# EAGLE board board_kelengkeng_v2 (EAGLE 9.6.2)
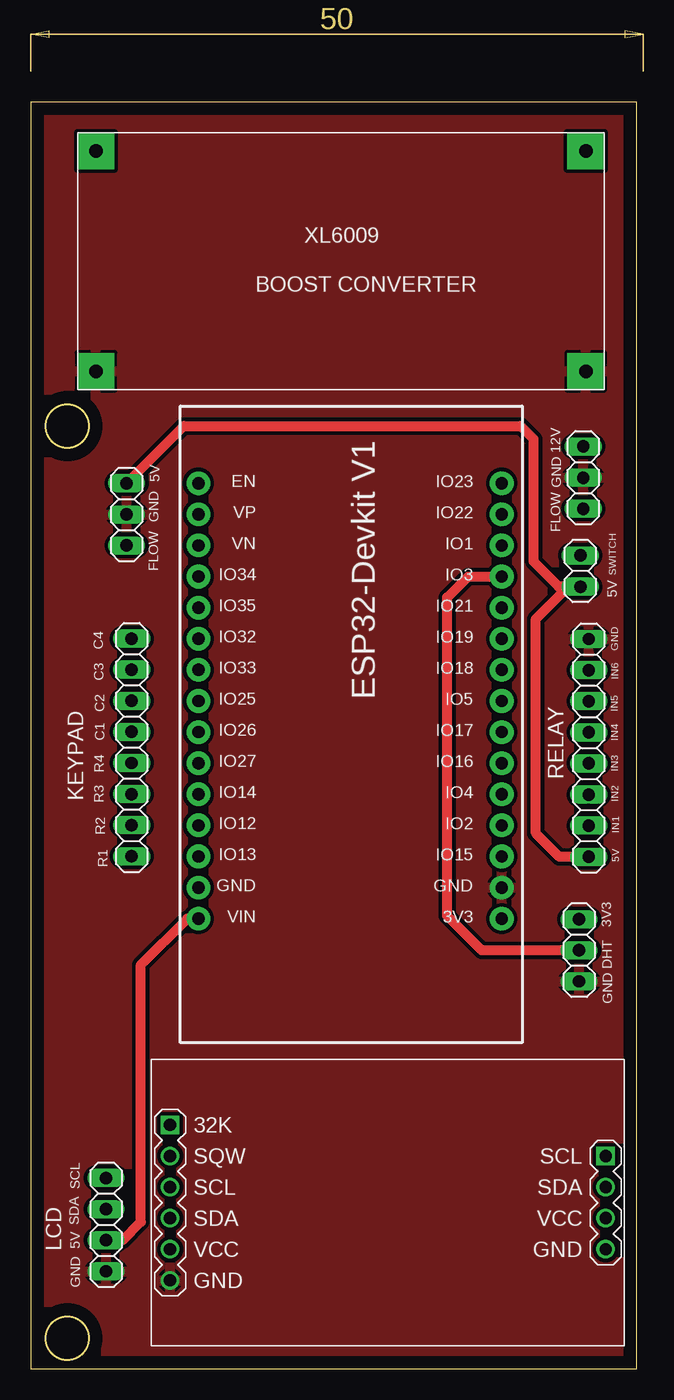
[diagram p0: board, top side]
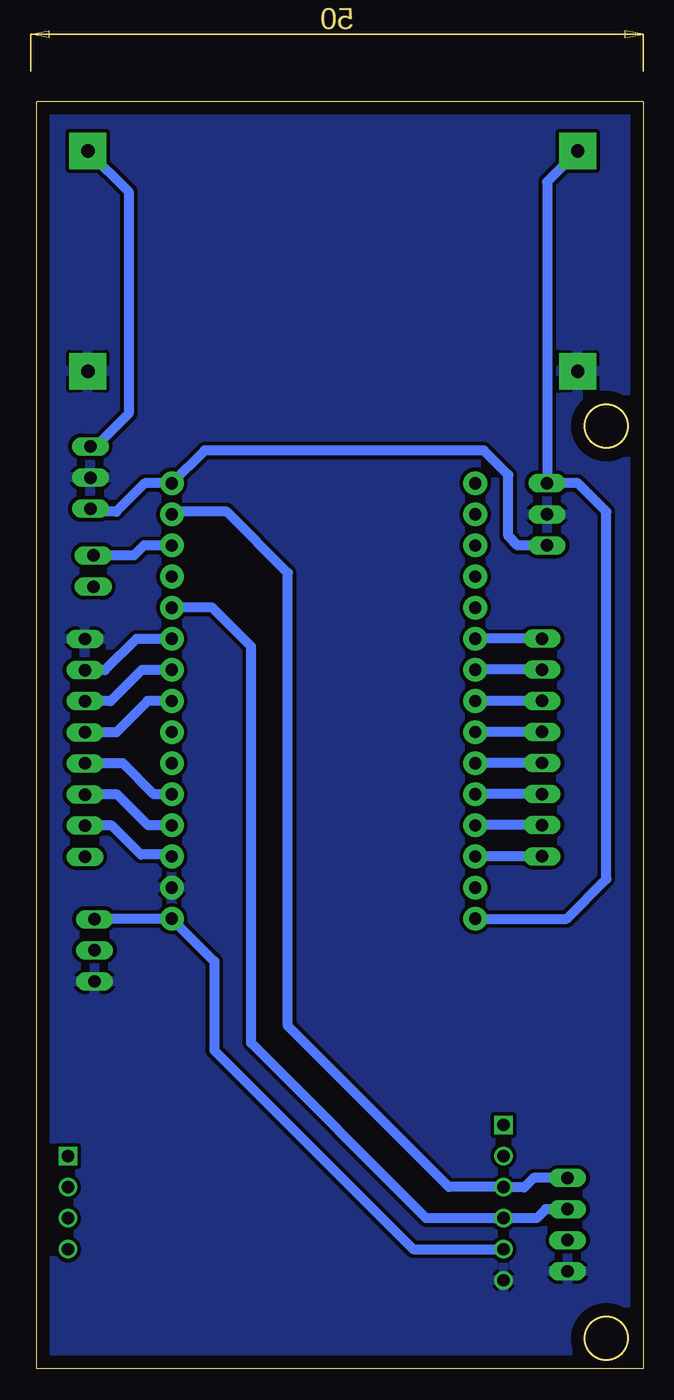
[diagram p1: board, bottom side, seen from below]

Size 49.5 x 103.5 mm. Coordinates in mm from the lower left corner, seen from the top.
Outline: 0,0 49.5,0 49.5,103.5 0,103.5 0,0
Outline: circle at 3,2.5 radius 1.75
Outline: circle at 3,77 radius 1.75
Copper layers (1*16): Top 0.035mm / dielectric 1.5mm / Bottom 0.035mm
Design rules "default *": minimum track width 6mil, minimum drill 0.35mm, track to track 0.3mm, track to pad 0.3mm, pad to pad 0.3mm, via to via 0.3mm, smd to smd 0.3mm, copper to edge 40mil, drill to drill 6mil, minimum pad ring 10mil, minimum via ring 8mil, stop-mask expansion 4mil, vias tented up to drill 0mil, thermal gap 10mil

## Footprints (pad centres in the part's own frame; a part is rotated, then mirrored left to right if it is on the bottom)
1X03 = drill 1.016 long: 1 -2.54,0; 2 0,0; 3 2.54,0
1X08 = drill 1.016 long: 1 -8.89,0; 2 -6.35,0; 3 -3.81,0; 4 -1.27,0; 5 1.27,0; 6 3.81,0; 7 6.35,0; 8 8.89,0
1X04 = drill 1.016 long: 1 -3.81,0; 2 -1.27,0; 3 1.27,0; 4 3.81,0
ESP32-DEVKITV1 = drill 1 pad 1.93: 1 -22.87,-13.54; 2 -20.33,-13.54; 3 -17.79,-13.54; 4 -15.25,-13.54; 5 -12.71,-13.54; 6 -10.17,-13.54; 7 -7.63,-13.54; 8 -5.09,-13.54; 9 -2.55,-13.54; 10 -0.01,-13.54; 11 2.53,-13.54; 12 5.07,-13.54; 13 7.61,-13.54; 14 10.15,-13.54; 15 12.69,-13.54; 16 12.69,11.23; 17 10.15,11.23; 18 7.61,11.23; 19 5.07,11.23; 20 2.53,11.23; 21 -0.01,11.23; 22 -2.55,11.23; 23 -5.09,11.23; 24 -7.63,11.23; 25 -10.17,11.23; 26 -12.71,11.23; 27 -15.25,11.23; 28 -17.79,11.23; 29 -20.33,11.23; 30 -22.87,11.23
XL6009 = drill 1.1 pad 3 square: VIN+ -20,9; VIN- -20,-9; VOUT+ 20,9; VOUT- 20,-9
RTC-DS3231-AT24C32 = drill 1 square: J1.1 -17.78,6.35; J2.1 17.78,3.81 | drill 1: J1.2 -17.78,3.81; J1.3 -17.78,1.27; J1.4 -17.78,-1.27; J1.5 -17.78,-3.81; J1.6 -17.78,-6.35; J2.2 17.78,1.27; J2.3 17.78,-1.27; J2.4 17.78,-3.81
1X02 = drill 1.016 long: 1 -1.27,0; 2 1.27,0

## Placement (x,y rotation side)
DHT  [1X03]  44.78,34.19 270 top
KEYPAD  [1X08]  8.25,50.76 90 top
LCD  [1X04]  6.16,11.78 90 top
RELAY  [1X08]  45.57,50.72 90 top
U$1  ESP32DEVKITV1  [ESP32-DEVKITV1]  24.93,59.64 90 top
U$2  XL6009  [XL6009]  25.33,90.47 0 top
U$3  RTC-DS3231-AT24C32  [RTC-DS3231-AT24C32]  29.17,13.58 0 top
WATERFLOW_5V  [1X03]  7.84,69.79 90 top
WATERFLOW_12V  [1X03]  45.12,72.79 90 top
WATERSWITCH  [1X02]  44.88,65.16 270 top

## Library data of the parts
DHT KEYPAD LCD RELAY WATERFLOW_5V WATERFLOW_12V WATERSWITCH = pinhead
U$1 = ESP32-DEVKITV1
U$2 = mario
U$3 = diy-modules

## Nets
3V3: DHT.1 U$1.1 U$3.J1.5
5V: LCD.2 RELAY.1 U$1.30 U$2.VIN+ WATERFLOW_5V.3 WATERSWITCH.2
12V: U$2.VOUT+ WATERFLOW_12V.3
C1: KEYPAD.5 U$1.24
C2: KEYPAD.6 U$1.23
C3: KEYPAD.7 U$1.22
C4: KEYPAD.8 U$1.21
DHT: DHT.2 U$1.12
ESP_WEMOS_RX: U$1.6
ESP_WEMOS_TX: U$1.7
GND: DHT.3 LCD.1 RELAY.8 U$1.2 U$2.VIN- U$2.VOUT- U$3.J1.6 WATERFLOW_5V.2 WATERFLOW_12V.2
GND.2: U$3.J2.4
IN1: RELAY.2 U$1.3
IN2: RELAY.3 U$1.4
IN3: RELAY.4 U$1.5
IN4: RELAY.5 U$1.8
IN5: RELAY.6 U$1.9
IN6: RELAY.7 U$1.10
N$1: U$1.29
R1: KEYPAD.1 U$1.28
R2: KEYPAD.2 U$1.27
R3: KEYPAD.3 U$1.26
R4: KEYPAD.4 U$1.25
SCL: LCD.4 U$1.14 U$3.J1.3
SDA: LCD.3 U$1.11 U$3.J1.4
VCC.2: U$3.J2.3
WF_DATA: U$1.15 WATERFLOW_5V.1 WATERFLOW_12V.1
WS_DATA: U$1.13 WATERSWITCH.1

## Tracks (layer width: path | path; a pad name or v marks a point on that pad's centre or on a via)
3V3
  Bottom 0.813: DHT.1 44.74,36.77 U$1.1 35,33.3 35,26 18.77,9.77 U$3.J1.5
5V
  Top 0.813: 13.93,37 U$1.30 12.77,36.77 9,33 9,12 7.51,10.51 LCD.2 | RELAY.1 43.17,41.83 41.26,43.74 41.26,61.26 43.89,63.89 WATERSWITCH.2 43.11,63.89 41.06,65.94 41.06,75.94 40,77 12.51,77 WATERFLOW_5V.3
  Bottom 0.813: U$2.VIN+ 7.84,96.96 WATERFLOW_5V.3 5.33,72.33 3,70 3,40 6.23,36.77 U$1.30
12V
  Bottom 0.813: U$2.VOUT+ 42,96.14 42,78 44.67,75.33 WATERFLOW_12V.3
C1
  Bottom 0.813: KEYPAD.5 13.68,52.03 U$1.24
C2
  Bottom 0.813: KEYPAD.6 13.68,54.57 U$1.23
C3
  Bottom 0.813: KEYPAD.7 13.68,57.11 U$1.22
C4
  Bottom 0.813: KEYPAD.8 13.68,59.65 U$1.21
DHT
  Top 0.813: DHT.2 36.81,34.19 34,37 34,63 35.71,64.71 U$1.12
GND
  pour Top: -0.71,104.56 49.43,104.56 49.43,-0.13 -0.71,-0.13
  pour Bottom: -0.87,104.44 49.49,104.44 49.49,0.01 -0.87,0.01
IN1
  Bottom 0.813: U$1.3 38.62,42 41,42 43.37,44.37 RELAY.2
IN2
  Bottom 0.813: U$1.4 40.39,44.39 42.91,46.91 RELAY.3
IN3
  Bottom 0.813: U$1.5 39.93,46.93 42.45,49.45 RELAY.4
IN4
  Bottom 0.813: U$1.8 40.45,54.55 43.01,51.99 RELAY.5
IN5
  Bottom 0.813: U$1.9 40.91,57.09 43.47,54.53 RELAY.6
IN6
  Bottom 0.813: U$1.10 41.37,59.63 43.93,57.07 RELAY.7
R1
  Bottom 0.813: KEYPAD.1 13.68,41.87 U$1.28
R2
  Bottom 0.813: KEYPAD.2 13.68,44.41 U$1.27
R3
  Bottom 0.813: KEYPAD.3 13.68,46.95 U$1.26
R4
  Bottom 0.813: KEYPAD.4 13.68,49.49 U$1.25
SCL
  Bottom 0.813: U$1.14 38.26,70 34,70 29,65 29,28 15.85,14.85 U$3.J1.3 11.37,14.83 9.7,14.83 8.94,15.59 LCD.4
SDA
  Bottom 0.813: LCD.3 7.95,13.05 8.69,12.31 U$3.J1.4 17.7,12.31 32,26.61 32,59 35.17,62.17 U$1.11
WF_DATA
  Bottom 0.813: WATERFLOW_12V.1 44.87,70 43,70 40.67,72.33 U$1.15 35.8,75 13,75 11,73 11,68 10.25,67.25 WATERFLOW_5V.1
WS_DATA
  Bottom 0.813: U$1.13 40.75,67.25 41.57,66.43 WATERSWITCH.1

## Text on the board
tNames: 12V | GND | 5V | FLOW | GND | SWITCH | FLOW | 5V | C4 | GND | C3 | IN6 | C2 | IN5 | C1 | IN4 | R4 | IN3 | R3 | IN2 | R2 | IN1 | R1 | 5V | 3V3 | DHT | GND | SCL | SDA | 5V | GND